# EAGLE board pj13_duplicate (EAGLE 7.4.0)
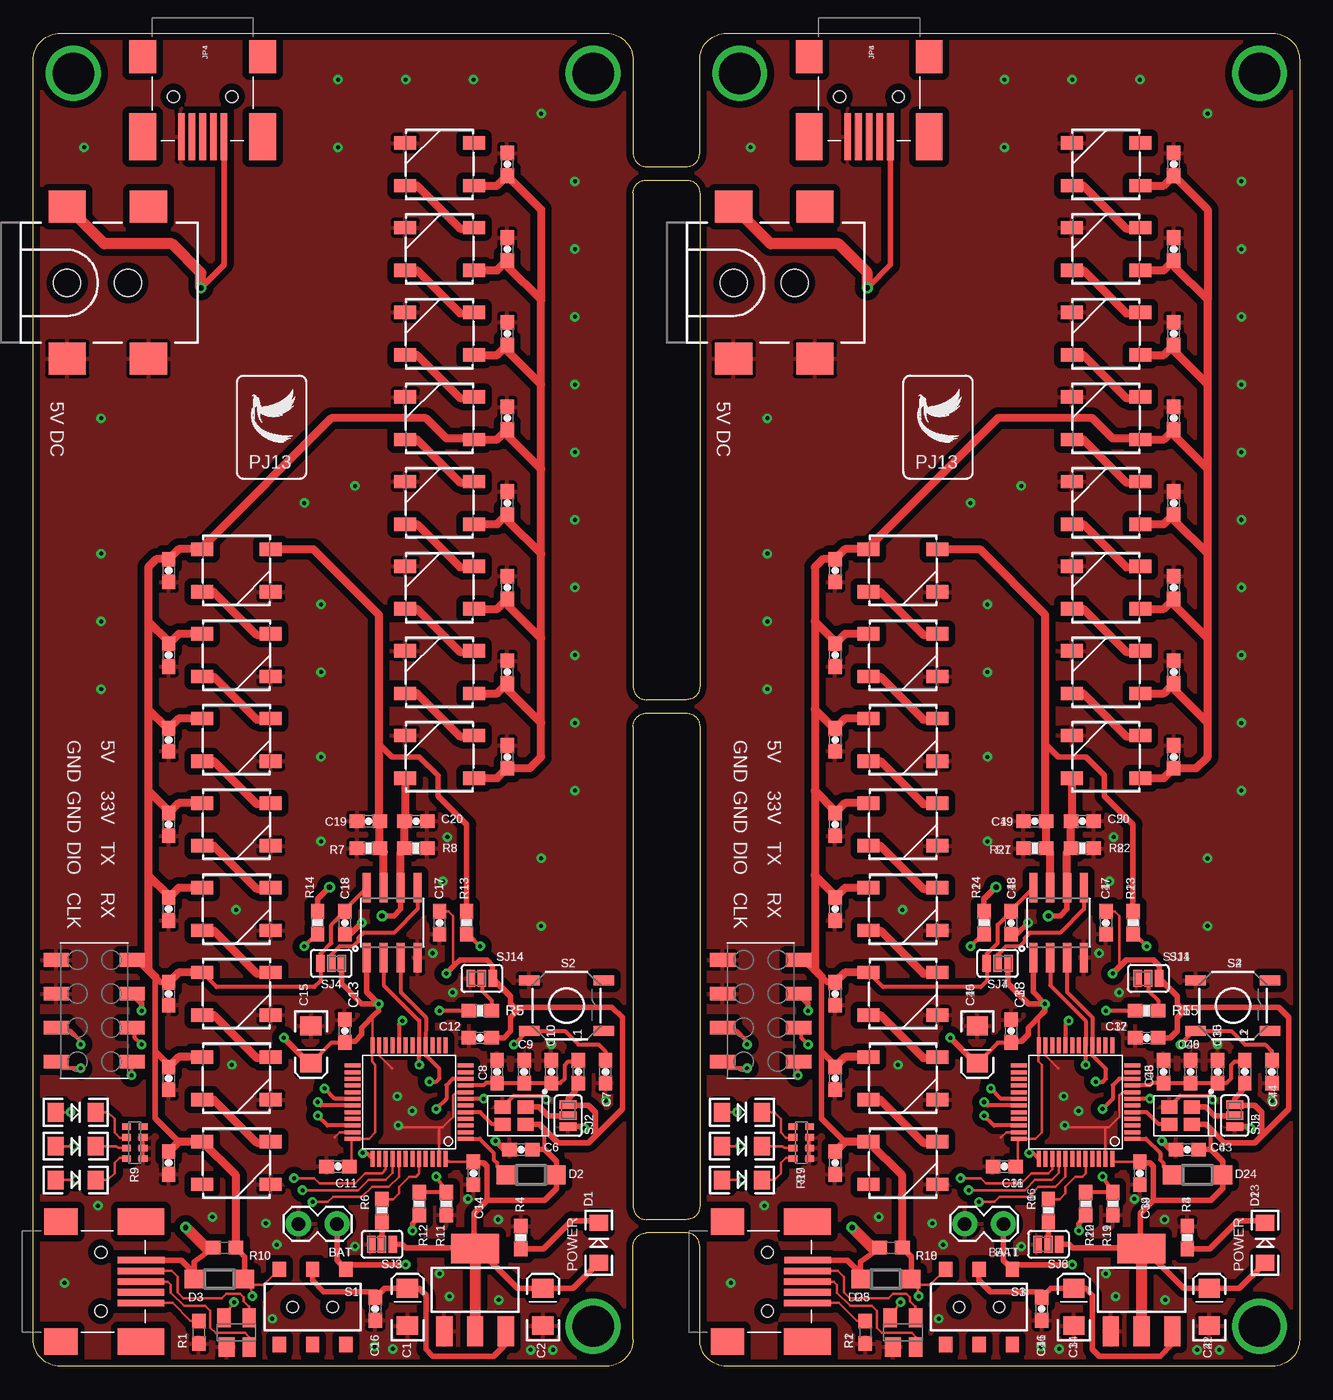
[diagram p0: board, top side]
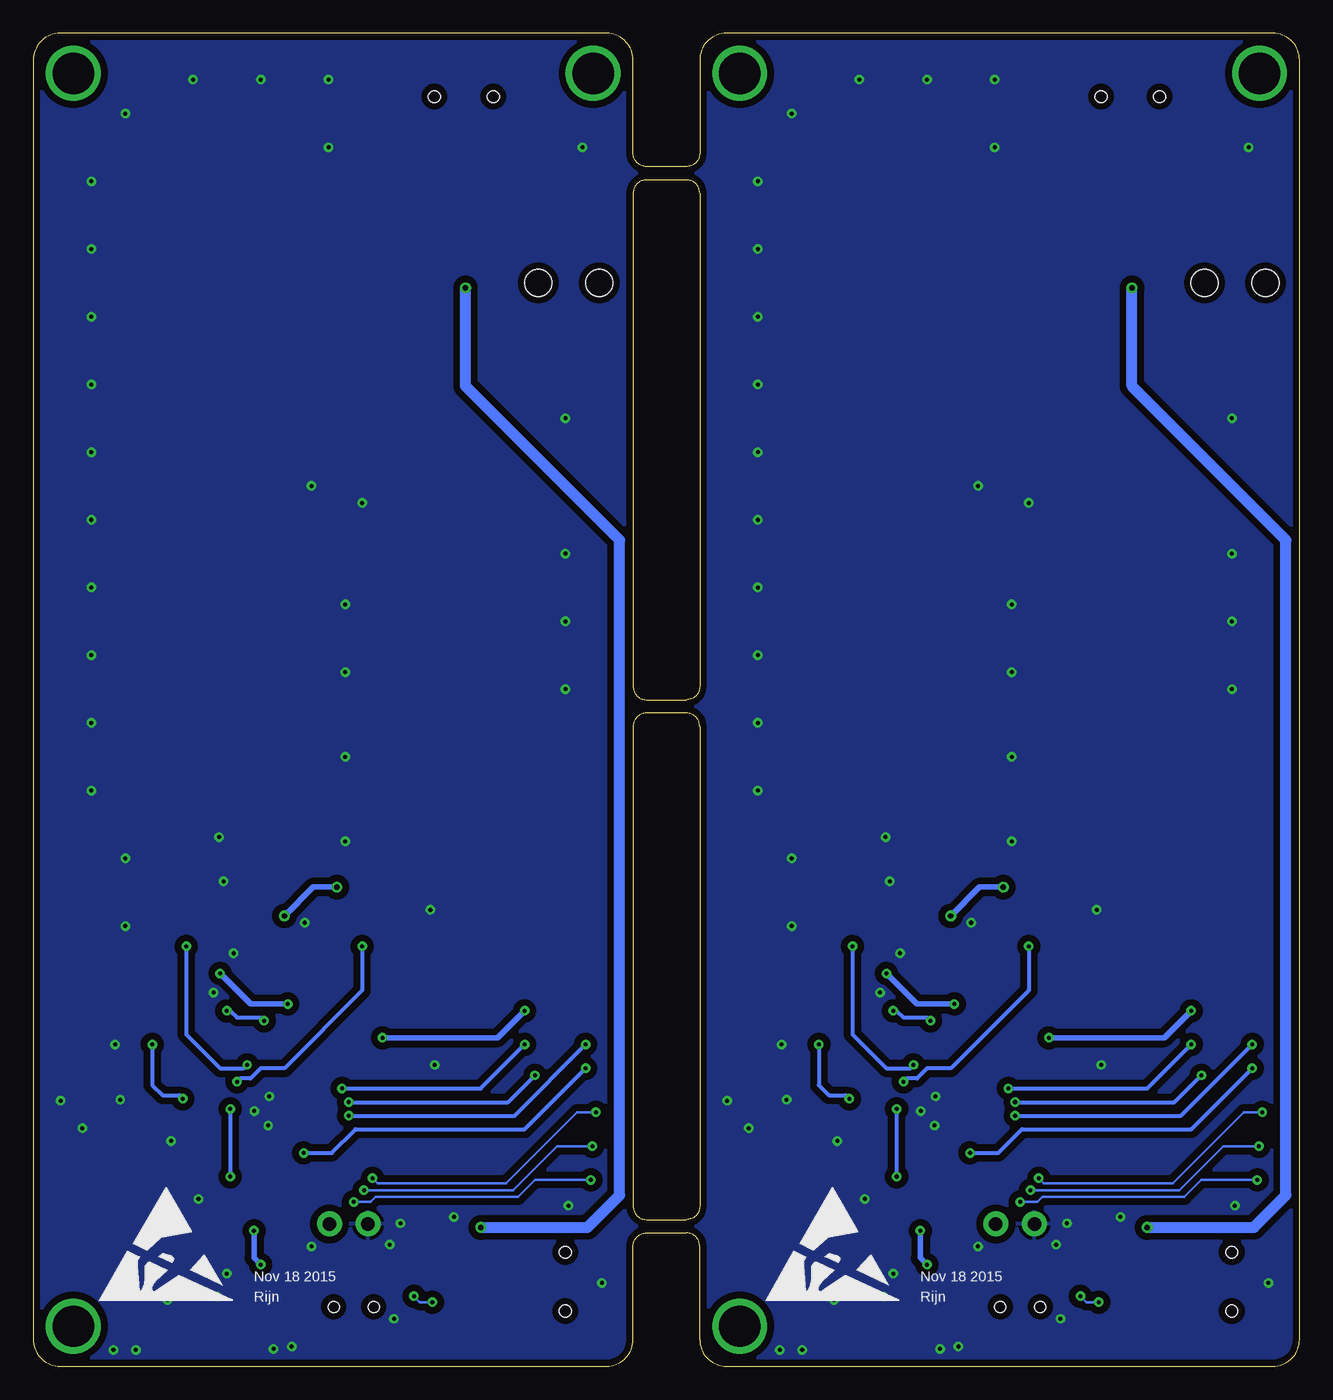
[diagram p1: board, bottom side, seen from below]

Size 95 x 100 mm. Coordinates in mm from the lower left corner, seen from the top.
Outline: 43,0 2,0 arc-90 0,2 0,98 arc-90 2,100 43,100 arc-90 45,98 45,91 arc90 46,90 49,90 arc90 50,91 50,98 arc-90 52,100 93,100 arc-90 95,98 95,2 arc-90 93,0 52,0 arc-90 50,2 50,9 arc90 49,10 46,10 arc90 45,9 45,2 arc-90 43,0
Outline: 45,88 45,51 arc90 46,50 49,50 arc90 50,51 50,88 arc90 49,89 46,89 arc90 45,88
Outline: 45,48 45,12 arc90 46,11 49,11 arc90 50,12 50,48 arc90 49,49 46,49 arc90 45,48
Copper layers (1*16): Top 0.035mm / dielectric 1.5mm / Bottom 0.035mm
Design rules "default *": minimum track width 6mil, minimum drill 12mil, track to track 6mil, track to pad 6mil, pad to pad 6mil, via to via 6mil, smd to smd 6mil, copper to edge 5mil, drill to drill 6mil, minimum pad ring 10mil, minimum via ring 8mil, stop-mask expansion 0mil, vias tented up to drill 12mil, thermal gap 10mil

## Footprints (pad centres in the part's own frame; a part is rotated, then mirrored left to right if it is on the bottom)
1X02_LOCK = drill 1.016 pad 1.88: 1 -0.178,0; 2 2.718,0
EIA3216 = smd 1.4 x 1.6: A 1.4,0; C -1.4,0
0603-CAP = smd 1.1 x 1: 1 -0.85,0; 2 0.85,0
LED-1206 = smd 1.2 x 1.4: A -1.5,0; C 1.5,0
SOD123 = smd 1.4 x 1.4: A 1.9,0; C -1.9,0
WS2812B = smd 1.651 x 1: 1 -2.577,1.6; 2 -2.577,-1.6; 3 2.577,-1.6; 4 2.577,1.6
USB-MINIB-OLD = smd 2.5 x 2: 1 -3,-4.5; 2 -3,4.5 | smd 3.5 x 2: 3 3,-4.5; 4 3,4.5 | smd 3.5 x 0.5: D+ 3,0; D- 3,0.8; GND 3,-1.6; ID 3,-0.8; VBUS 3.01,1.61 | hole 0.9: 0,2.2; 0,-2.2
POWER_JACK_SMD = smd 2.8 x 2.4: GND 0,-5.7; P$4 6.1,-5.7; VIN0 0,5.7; VIN1 6.1,5.7 | hole 2.032: 0,0; 4.572,0
2X4_SMD = smd 1.02 x 1.9: 1 -2.54,-2.85; 2 -2.54,2.85; 3 0,-2.85; 4 0,2.85; 5 2.54,-2.85; 6 2.54,2.85; 7 5.08,-2.85; 8 5.08,2.85
0603 = smd 1.1 x 1: 1 -0.85,0; 2 0.85,0
2.5X2-4-PAD = smd 1.2 x 1: 1 -0.85,-0.65; 2 0.85,-0.65; 3 0.85,0.65; 4 -0.85,0.65
0603-RES = smd 1.1 x 1: 1 -0.85,0; 2 0.85,0
0603-ARV = smd 0.5 x 0.65: 1 -1.2,-0.625; 2 -0.4,-0.625; 3 0.4,-0.625; 4 1.2,-0.625; 5 1.2,0.625; 6 0.4,0.625; 7 -0.4,0.625; 8 -1.2,0.625
AYZ0202 = smd 1 x 1.15: 1 -2.5,2.825; 2 0,2.825; 3 2.5,2.825; 4 -2.5,-2.825; 5 0,-2.825; 6 2.5,-2.825 | hole 0.85: 1.5,0; -1.5,0
TACTILE-SWITCH-SMD = smd 1.524 x 0.762: 1 -2.794,1.905; 2 2.794,1.905; 3 -2.794,-1.905; 4 2.794,-1.905
PAD-JUMPER-3-2OF3_NC_BY_PASTE_YES_SILK_FULL_BOX = smd 0.635 x 1.27: 1 -0.813,0; 2 0,0; 3 0.813,0
SOT223 = smd 1.219 x 2.235: 1 -2.311,-3.099; 2 0,-3.099; 3 2.311,-3.099 | smd 3.6 x 2.2: 4 0,3.099
SOT143 = smd 1.2 x 1.44: 1 -0.75,-1.1 | smd 1 x 1.44: 2 0.95,-1.1; 3 0.95,1.1; 4 -0.95,1.1
LQFP48 = smd 0.3 x 1.2: 1 -2.75,-4.25; 2 -2.25,-4.25; 3 -1.75,-4.25; 4 -1.25,-4.25; 5 -0.75,-4.25; 6 -0.25,-4.25; 7 0.25,-4.25; 8 0.75,-4.25; 9 1.25,-4.25; 10 1.75,-4.25; 11 2.25,-4.25; 12 2.75,-4.25; 25 2.75,4.25; 26 2.25,4.25; 27 1.75,4.25; 28 1.25,4.25; 29 0.75,4.25; 30 0.25,4.25; 31 -0.25,4.25; 32 -0.75,4.25; 33 -1.25,4.25; 34 -1.75,4.25; 35 -2.25,4.25; 36 -2.75,4.25 | smd 1.2 x 0.3: 13 4.25,-2.75; 14 4.25,-2.25; 15 4.25,-1.75; 16 4.25,-1.25; 17 4.25,-0.75; 18 4.25,-0.25; 19 4.25,0.25; 20 4.25,0.75; 21 4.25,1.25; 22 4.25,1.75; 23 4.25,2.25; 24 4.25,2.75; 37 -4.25,2.75; 38 -4.25,2.25; 39 -4.25,1.75; 40 -4.25,1.25; 41 -4.25,0.75; 42 -4.25,0.25; 43 -4.25,-0.25; 44 -4.25,-0.75; 45 -4.25,-1.25; 46 -4.25,-1.75; 47 -4.25,-2.25; 48 -4.25,-2.75
SO08 = smd 0.61 x 2.21: 1 -1.905,-2.616; 2 -0.635,-2.616; 3 0.635,-2.616; 4 1.905,-2.616; 5 1.905,2.616; 6 0.635,2.616; 7 -0.635,2.616; 8 -1.905,2.616

## Placement (x,y rotation side)
BAT  [1X02_LOCK]  22.61,10.67 180 top
BAT1  [1X02_LOCK]  72.61,10.67 180 top
C1  10uF  [EIA3216]  28.07,4.45 90 top
C2  10uF  [EIA3216]  38.23,4.45 90 top
C3  1nF  [0603-CAP]  10.16,46.99 270 top
C4  1nF  [0603-CAP]  10.16,40.64 270 top
C5  1nF  [0603-CAP]  10.16,34.29 270 top
C6  1.0uF  [0603-CAP]  36.58,16.26 0 top
C7  1.0uF  [0603-CAP]  42.93,22.1 90 top
C8  1.0uF  [0603-CAP]  34.8,22.1 90 top
C9  10nF  [0603-CAP]  36.83,22.1 90 top
C10  10nF  [0603-CAP]  38.86,22.1 90 top
C11  0.1uF  [0603-CAP]  22.86,14.99 180 top
C12  0.1uF  [0603-CAP]  33.53,24.64 180 top
C13  0.1uF  [0603-CAP]  23.37,25.15 90 top
C14  0.1uF  [0603-CAP]  33.02,14.48 270 top
C15  10uF  [EIA3216]  20.83,24.13 270 top
C16  10nF  [0603-CAP]  25.65,4.29 270 top
C17  0.1uF  [0603-CAP]  30.48,33.27 270 top
C18  0.1uF  [0603-CAP]  23.37,33.27 270 top
C19  0.1uF  [0603-CAP]  25.15,40.89 180 top
C20  0.1uF  [0603-CAP]  28.7,40.89 0 top
C21  1nF  [0603-CAP]  35.56,90.17 90 top
C22  1nF  [0603-CAP]  35.56,83.82 90 top
C23  1nF  [0603-CAP]  35.56,77.47 90 top
C24  1nF  [0603-CAP]  35.56,71.12 90 top
C25  1nF  [0603-CAP]  35.56,64.77 90 top
C26  1nF  [0603-CAP]  35.56,58.42 90 top
C27  1nF  [0603-CAP]  35.56,45.72 90 top
C28  1nF  [0603-CAP]  35.56,52.07 90 top
C29  1nF  [0603-CAP]  10.16,53.34 270 top
C30  1nF  [0603-CAP]  10.16,59.69 270 top
C31  1nF  [0603-CAP]  10.16,27.94 270 top
C32  1nF  [0603-CAP]  10.16,21.59 270 top
C33  1nF  [0603-CAP]  10.16,15.24 270 top
C34  10uF  [EIA3216]  78.07,4.45 90 top
C35  10nF  [0603-CAP]  88.86,22.1 90 top
C36  0.1uF  [0603-CAP]  72.86,14.99 180 top
C37  0.1uF  [0603-CAP]  83.53,24.64 180 top
C38  0.1uF  [0603-CAP]  73.37,25.15 90 top
C39  0.1uF  [0603-CAP]  83.02,14.48 270 top
C40  10uF  [EIA3216]  70.83,24.13 270 top
C41  10nF  [0603-CAP]  75.65,4.29 270 top
C42  10uF  [EIA3216]  88.23,4.45 90 top
C43  1.0uF  [0603-CAP]  86.58,16.26 0 top
C44  1.0uF  [0603-CAP]  92.93,22.1 90 top
C45  1.0uF  [0603-CAP]  84.8,22.1 90 top
C46  10nF  [0603-CAP]  86.83,22.1 90 top
C47  0.1uF  [0603-CAP]  80.48,33.27 270 top
C48  0.1uF  [0603-CAP]  73.37,33.27 270 top
C49  0.1uF  [0603-CAP]  75.15,40.89 180 top
C50  0.1uF  [0603-CAP]  78.7,40.89 0 top
C51  1nF  [0603-CAP]  85.56,90.17 90 top
C52  1nF  [0603-CAP]  85.56,83.82 90 top
C53  1nF  [0603-CAP]  85.56,77.47 90 top
C54  1nF  [0603-CAP]  85.56,71.12 90 top
C55  1nF  [0603-CAP]  85.56,64.77 90 top
C56  1nF  [0603-CAP]  85.56,58.42 90 top
C57  1nF  [0603-CAP]  85.56,45.72 90 top
C58  1nF  [0603-CAP]  85.56,52.07 90 top
C59  1nF  [0603-CAP]  60.16,53.34 270 top
C60  1nF  [0603-CAP]  60.16,59.69 270 top
C61  1nF  [0603-CAP]  60.16,46.99 270 top
C62  1nF  [0603-CAP]  60.16,40.64 270 top
C63  1nF  [0603-CAP]  60.16,34.29 270 top
C64  1nF  [0603-CAP]  60.16,27.94 270 top
C65  1nF  [0603-CAP]  60.16,21.59 270 top
C66  1nF  [0603-CAP]  60.16,15.24 270 top
D1  YELLOW  [LED-1206]  42.42,9.27 90 top
D2  MBR0520LT  [SOD123]  37.34,14.35 0 top
D3  MBR0520LT  [SOD123]  13.97,6.53 180 top
D4  YELLOW  [LED-1206]  3.17,19.05 0 top
D5  YELLOW  [LED-1206]  3.17,16.51 0 top
D6  YELLOW  [LED-1206]  3.17,13.97 0 top
D7  [WS2812B]  15.24,59.69 0 top
D8  [WS2812B]  15.24,53.34 0 top
D9  [WS2812B]  15.24,46.99 0 top
D10  [WS2812B]  15.24,40.64 0 top
D11  [WS2812B]  15.24,34.29 0 top
D12  [WS2812B]  30.48,45.72 180 top
D13  [WS2812B]  30.48,52.07 180 top
D14  [WS2812B]  30.48,58.42 180 top
D15  [WS2812B]  30.48,64.77 180 top
D16  [WS2812B]  30.48,71.12 180 top
D17  [WS2812B]  15.24,27.94 0 top
D18  [WS2812B]  15.24,21.59 0 top
D19  [WS2812B]  15.24,15.24 0 top
D20  [WS2812B]  30.48,77.47 180 top
D21  [WS2812B]  30.48,83.82 180 top
D22  [WS2812B]  30.48,90.17 180 top
D23  YELLOW  [LED-1206]  92.42,9.27 90 top
D24  MBR0520LT  [SOD123]  87.34,14.35 0 top
D25  MBR0520LT  [SOD123]  63.97,6.53 180 top
D26  YELLOW  [LED-1206]  53.17,19.05 0 top
D27  YELLOW  [LED-1206]  53.17,16.51 0 top
D28  YELLOW  [LED-1206]  53.17,13.97 0 top
D29  [WS2812B]  65.24,59.69 0 top
D30  [WS2812B]  65.24,53.34 0 top
D31  [WS2812B]  65.24,46.99 0 top
D32  [WS2812B]  65.24,40.64 0 top
D33  [WS2812B]  65.24,34.29 0 top
D34  [WS2812B]  80.48,45.72 180 top
D35  [WS2812B]  80.48,52.07 180 top
D36  [WS2812B]  80.48,58.42 180 top
D37  [WS2812B]  80.48,64.77 180 top
D38  [WS2812B]  80.48,71.12 180 top
D39  [WS2812B]  65.24,27.94 0 top
D40  [WS2812B]  65.24,21.59 0 top
D41  [WS2812B]  65.24,15.24 0 top
D42  [WS2812B]  80.48,77.47 180 top
D43  [WS2812B]  80.48,83.82 180 top
D44  [WS2812B]  80.48,90.17 180 top
JP1  USBOLD  [USB-MINIB-OLD]  5.08,6.35 0 top
JP2  5.5x2.1mm Barrel  [POWER_JACK_SMD]  2.54,81.28 0 top
JP3  [2X4_SMD]  4.57,25.4 90 top
JP4  USBOLD  [USB-MINIB-OLD]  12.7,95.25 270 top
JP5  USBOLD  [USB-MINIB-OLD]  55.08,6.35 0 top
JP6  [2X4_SMD]  54.57,25.4 90 top
JP7  5.5x2.1mm Barrel  [POWER_JACK_SMD]  52.54,81.28 0 top
JP8  USBOLD  [USB-MINIB-OLD]  62.7,95.25 270 top
L1  [0603]  40.89,22.1 270 top
L2  [0603]  90.89,22.1 270 top
OS1  OSC-OE-IQXO-793  [2.5X2-4-PAD]  36.07,18.8 180 top
OS2  OSC-OE-IQXO-793  [2.5X2-4-PAD]  86.07,18.8 180 top
R1  0  [0603]  12.42,2.54 270 top
R2  0  [0603]  62.42,2.54 270 top
R3  680  [0603-RES]  86.58,9.65 270 top
R4  680  [0603-RES]  36.58,9.65 270 top
R5  10K  [0603-RES]  33.53,26.67 0 top
R6  10K  [0603-RES]  26.16,11.68 90 top
R7  680  [0603-RES]  25.15,38.86 180 top
R8  680  [0603-RES]  28.7,38.86 0 top
R9  [0603-ARV]  7.62,16.76 270 top
R10  0  [0603]  14.35,8.89 180 top
R11  10K  [0603-RES]  30.99,12.19 270 top
R12  10K  [0603-RES]  28.96,12.19 90 top
R13  0  [0603-RES]  32.51,33.27 90 top
R14  0  [0603-RES]  21.34,33.27 90 top
R15  10K  [0603-RES]  83.53,26.67 0 top
R16  10K  [0603-RES]  76.16,11.68 90 top
R17  [0603-ARV]  57.62,16.76 270 top
R18  0  [0603]  64.35,8.89 180 top
R19  10K  [0603-RES]  80.99,12.19 270 top
R20  10K  [0603-RES]  78.96,12.19 90 top
R21  680  [0603-RES]  75.15,38.86 180 top
R22  680  [0603-RES]  78.7,38.86 0 top
R23  0  [0603-RES]  82.51,33.27 90 top
R24  0  [0603-RES]  71.34,33.27 90 top
S1  [AYZ0202]  20.95,4.45 0 top
S2  SWITCH-MOMENTARY-2SMD  [TACTILE-SWITCH-SMD]  40.01,27.05 0 top
S3  [AYZ0202]  70.95,4.45 0 top
S4  SWITCH-MOMENTARY-2SMD  [TACTILE-SWITCH-SMD]  90,27.05 0 top
SJ1  JUMPER-PAD-3-2OF3_NC_BY_PASTE  [PAD-JUMPER-3-2OF3_NC_BY_PASTE_YES_SILK_FULL_BOX]  83.66,29.08 180 top
SJ2  JUMPER-PAD-3-2OF3_NC_BY_PASTE  [PAD-JUMPER-3-2OF3_NC_BY_PASTE_YES_SILK_FULL_BOX]  40.13,18.8 90 top
SJ3  JUMPER-PAD-3-2OF3_NC_BY_PASTE  [PAD-JUMPER-3-2OF3_NC_BY_PASTE_YES_SILK_FULL_BOX]  26.16,9.14 180 top
SJ4  JUMPER-PAD-3-2OF3_NC_BY_PASTE  [PAD-JUMPER-3-2OF3_NC_BY_PASTE_YES_SILK_FULL_BOX]  22.35,30.23 0 top
SJ5  JUMPER-PAD-3-2OF3_NC_BY_PASTE  [PAD-JUMPER-3-2OF3_NC_BY_PASTE_YES_SILK_FULL_BOX]  90.13,18.8 90 top
SJ6  JUMPER-PAD-3-2OF3_NC_BY_PASTE  [PAD-JUMPER-3-2OF3_NC_BY_PASTE_YES_SILK_FULL_BOX]  76.16,9.14 180 top
SJ7  JUMPER-PAD-3-2OF3_NC_BY_PASTE  [PAD-JUMPER-3-2OF3_NC_BY_PASTE_YES_SILK_FULL_BOX]  72.35,30.23 0 top
SJ14  JUMPER-PAD-3-2OF3_NC_BY_PASTE  [PAD-JUMPER-3-2OF3_NC_BY_PASTE_YES_SILK_FULL_BOX]  33.66,29.08 180 top
U1  [SOT223]  33.15,5.71 0 top
U2  PRTR5V0U2X  [SOT143]  15.24,2.54 0 top
U3  [SOT223]  83.15,5.71 0 top
U4  STM32F103C8T  [LQFP48]  28.19,19.81 90 top
U5  PRTR5V0U2X  [SOT143]  65.24,2.54 0 top
U6  STM32F103C8T  [LQFP48]  78.19,19.81 90 top
U$1  [LOGO]  16.33,69.29 0 top
U$2  [ESD_10.00]  40.13,4.83 0 bottom
U$3  NLSX4373  [SO08]  26.92,33.27 0 top
U$4  [LOGO]  66.33,69.29 0 top
U$5  [ESD_10.00]  90.13,4.83 0 bottom
U$6  NLSX4373  [SO08]  76.92,33.27 0 top

## Library data of the parts
BAT BAT1 JP1 JP3-JP6 JP8 = SparkFun-Connectors
C1 C2 C15 C34 C40 C42 = SparkFun-Capacitors; PROD_ID: CAP-00811
C3-C5 C11-C14 C17-C33 C36-C39 C47-C66 = SparkFun-Capacitors; PROD_ID: CAP-08604
C6-C8 C43-C45 = SparkFun-Capacitors; PROD_ID: CAP-00868
C9 C10 C16 C35 C41 C46 = SparkFun-Capacitors; PROD_ID: CAP-00867
D1 D4-D6 D23 D26-D28 = SparkFun-LED; PROD_ID: DIO-00820
D2 D3 D24 D25 = diode
D7-D22 D29-D44 = SparkFun-LED; PROD_ID: DIO-12503
JP2 JP7 = SparkFun-Connectors; PROD_ID: CONN-08106; SF_ID: PRT-12748
L1 L2 SJ1-SJ7 SJ14 = SparkFun-Passives
OS1 OS2 = IQD-Frequency-Products
R1 R2 R10 R18 = SparkFun-Resistors; PROD_ID: RES-08609
R3 R4 R7 R8 R13 R14 R21-R24 = SparkFun-Resistors; PROD_ID: RES-09333
R5 R6 R11 R12 R15 R16 R19 R20 = SparkFun-Resistors; PROD_ID: RES-00824
R9 R17 = SparkFun-Resistors
S1 S3 = SparkFun-Electromechanical; PROD_ID: SWCH-08179; SF_ID: COM-00597
S2 S4 = SparkFun-Electromechanical; PROD_ID: SWCH-08247
U1 U3 = SparkFun-PowerIC; PROD_ID: VREG-08170
U2 U5 = semicon-smd-ipc
U4 U6 = micro-stm_v3
U$1 U$4 = r1
U$2 U$5 = logo
U$3 U$6 = SparkFun-DigitalIC

## Nets
3.3V: C2.A C6.2 C11.1 C12.1 C13.1 C14.1 C15.A C17.1 D1.A D2.A JP3.5 L1.2 OS1.4 SJ2.3 SJ3.1 SJ4.3 SJ14.1 U1.2 U1.4 U4.24 U4.36 U4.48 U$3.1
3.3V1: C36.1 C37.1 C38.1 C39.1 C40.A C42.A C43.2 C47.1 D23.A D24.A JP6.5 L2.2 OS2.4 SJ1.1 SJ5.3 SJ6.1 SJ7.3 U3.2 U3.4 U6.24 U6.36 U6.48 U$6.1
5V: C3.1 C4.1 C5.1 C18.1 C21.1 C22.1 C23.1 C24.1 C25.1 C26.1 C27.1 C28.1 C29.1 C30.1 C31.1 C32.1 C33.1 D3.C D7.1 D8.1 D9.1 D10.1 D11.1 D12.1 D13.1 D14.1 D15.1 D16.1 D17.1 D18.1 D19.1 D20.1 D21.1 D22.1 JP3.7 R10.1 S1.1 SJ4.1 U2.4 U$3.8
5V1: C48.1 C51.1 C52.1 C53.1 C54.1 C55.1 C56.1 C57.1 C58.1 C59.1 C60.1 C61.1 C62.1 C63.1 C64.1 C65.1 C66.1 D25.C D29.1 D30.1 D31.1 D32.1 D33.1 D34.1 D35.1 D36.1 D37.1 D38.1 D39.1 D40.1 D41.1 D42.1 D43.1 D44.1 JP6.7 R18.1 S3.1 SJ7.1 U5.4 U$6.8
BAT+: BAT.1 R12.1 S1.3
BAT+1: BAT1.1 R20.1 S3.3
BLE_EN: U4.14
BLE_EN1: U6.14
BLE_STATE: U4.11
BLE_STATE1: U6.11
CLK_16M: OS1.3 U4.5
CLK_16M1: OS2.3 U6.5
D+: JP1.D+ U2.2
D+1: JP5.D+ U5.2
D-: JP1.D- U2.3
D-1: JP5.D- U5.3
ESP_CHPD: U4.25
ESP_CHPD1: U6.25
ESP_GPIO0: U4.28
ESP_GPIO1: U6.27
ESP_GPIO2: U4.26
ESP_GPIO3: U6.26
ESP_GPIO4: U6.28
ESP_GPIO16: U4.27
GND: BAT.2 C1.C C2.C C3.2 C4.2 C5.2 C6.1 C7.1 C8.2 C9.2 C10.2 C11.2 C12.2 C13.2 C14.2 C15.C C16.2 C17.2 C18.2 C19.2 C20.2 C21.2 C22.2 C23.2 C24.2 C25.2 C26.2 C27.2 C28.2 C29.2 C30.2 C31.2 C32.2 C33.2 D7.3 D8.3 D9.3 D10.3 D11.3 D12.3 D13.3 D14.3 D15.3 D16.3 D17.3 D18.3 D19.3 D20.3 D21.3 D22.3 JP2.GND JP2.P$4 JP3.6 JP3.8 JP4.GND OS1.2 R1.2 R4.1 R7.2 R8.2 R9.5 R9.6 R9.7 R11.2 S2.1 SJ2.1 SJ3.3 SJ14.3 U1.1 U2.1 U4.8 U4.23 U4.35 U4.47 U$3.4
GND1: BAT1.2 C34.C C35.2 C36.2 C37.2 C38.2 C39.2 C40.C C41.2 C42.C C43.1 C44.1 C45.2 C46.2 C47.2 C48.2 C49.2 C50.2 C51.2 C52.2 C53.2 C54.2 C55.2 C56.2 C57.2 C58.2 C59.2 C60.2 C61.2 C62.2 C63.2 C64.2 C65.2 C66.2 D29.3 D30.3 D31.3 D32.3 D33.3 D34.3 D35.3 D36.3 D37.3 D38.3 D39.3 D40.3 D41.3 D42.3 D43.3 D44.3 JP6.6 JP6.8 JP7.GND JP7.P$4 JP8.GND OS2.2 R2.2 R3.1 R17.5 R17.6 R17.7 R19.2 R21.2 R22.2 S4.1 SJ1.3 SJ5.1 SJ6.3 U3.1 U5.1 U6.8 U6.23 U6.35 U6.47 U$6.4
N$1: JP1.GND R1.1
N$2: D11.2 D17.4
N$3: D1.C R4.2
N$4: D2.C U4.1
N$5: R11.1 R12.2 U4.10
N$6: C8.1 C9.1 C10.1 L1.1 U4.9
N$7: R6.2 U4.44
N$8: D6.A U4.41
N$9: R6.1 SJ3.2
N$10: D17.2 D18.4
N$11: OS1.1 SJ2.2
N$13: D5.A U4.40
N$14: SJ4.2 U$3.5
N$15: D18.2 D19.4
N$16: D4.A U4.39
N$17: D4.C R9.2
N$18: D5.C R9.3
N$19: D6.C R9.4
N$20: C1.A C16.1 S1.2 U1.3
N$24: D12.2 D13.4
N$25: D13.2 D14.4
N$26: R13.1 U4.17 U$3.2
N$27: R14.1 U4.16 U$3.3
N$28: D7.2 D8.4
N$29: D8.2 D9.4
N$30: D9.2 D10.4
N$31: D10.2 D11.4
N$32: D14.2 D15.4
N$33: D15.2 D16.4
N$34: D16.2 D20.4
N$35: D20.2 D21.4
N$36: D21.2 D22.4
N$37: JP5.GND R2.1
N$38: D23.C R3.2
N$39: R16.2 U6.44
N$40: R16.1 SJ6.2
N$41: OS2.1 SJ5.2
N$42: C35.1 C45.1 C46.1 L2.1 U6.9
N$43: D24.C U6.1
N$44: R15.2 SJ1.2
N$45: D28.A U6.41
N$46: D27.A U6.40
N$47: D26.A U6.39
N$48: R5.2 SJ14.2
N$49: D26.C R17.2
N$50: D27.C R17.3
N$51: D28.C R17.4
N$52: C34.A C41.1 S3.2 U3.3
N$53: R19.1 R20.2 U6.10
N$57: SJ7.2 U$6.5
N$58: R23.1 U6.17 U$6.2
N$59: R24.1 U6.16 U$6.3
N$60: D29.2 D30.4
N$61: D30.2 D31.4
N$62: D31.2 D32.4
N$63: D32.2 D33.4
N$64: D34.2 D35.4
N$65: D35.2 D36.4
N$66: D36.2 D37.4
N$67: D37.2 D38.4
N$68: D33.2 D39.4
N$69: D39.2 D40.4
N$70: D40.2 D41.4
N$71: D38.2 D42.4
N$72: D42.2 D43.4
N$73: D43.2 D44.4
NRF_CSN: U4.32
NRF_CSN1: U6.32
NRST: C7.2 S2.3 U4.7
NRST1: C44.2 S4.3 U6.7
OURET: R5.1 U4.20
OURET1: R15.1 U6.20
SIG1: C19.1 D7.4 R7.1 R13.2 U$3.7
SIG2: C20.1 D12.4 R8.1 R14.2 U$3.6
SIG3: C49.1 D29.4 R21.1 R23.2 U$6.7
SIG4: C50.1 D34.4 R22.1 R24.2 U$6.6
SWCLK: JP3.2 U4.37
SWCLK1: JP6.2 U6.37
SWDIO: JP3.4 U4.34
SWDIO1: JP6.4 U6.34
USART1_RX: JP3.1 U4.31
USART1_RX1: JP6.1 U6.31
USART1_TX: JP3.3 U4.30
USART1_TX1: JP6.3 U6.30
USART2_RX: U4.13
USART2_RX1: U6.13
USART2_TX: U4.12
USART2_TX1: U6.12
USART3_RX: U4.22
USART3_RX1: U6.22
USART3_TX: U4.21
USART3_TX1: U6.21
VBUS: D3.A JP1.VBUS JP2.VIN0 JP4.VBUS R10.2
VBUS1: D25.A JP5.VBUS JP7.VIN0 JP8.VBUS R18.2

## Tracks (layer width: path | path; a pad name or v marks a point on that pad's centre or on a via)
3.3V  (via drill 0.3)
  Top 0.203: C14.1 31.18,15.33 U4.48 | 25.65,26.42 25.44,26.21 U4.24 25.4,24.02 25.4,22.86 25.65,22.61 25.65,17.53 25.19,17.06 U4.36 23.88,16.99 23.88,14.99 | C17.1 31.15,34.12 31.5,33.78 31.5,30.23 31.62,30.1
  Top 0.305: 23.37,24.26 22.36,24.26 C15.A | 38.35,16.26 38.35,17.78 38.1,18.03
  Top 0.406: SJ3.1 27.69,9.14 27.94,8.89 33.07,8.89 | 33.07,8.89 U1.4 33.35,8.81 36.32,5.84 C2.A 40.49,5.84 D1.A | 33.07,8.89 33.07,11.48 34.04,12.45 | 34.04,12.45 34.04,14.99 33.78,15.24 33.11,15.24 C14.1 | 34.04,12.45 38.35,12.45 39.24,13.33 D2.A 39.24,15.37 38.35,16.26 C6.2 | OS1.4 37.99,18.15 38.1,18.03 39.37,16.76 41.66,16.76 42.16,17.27 | 42.16,17.27 42.16,19.05 41.66,19.56 40.18,19.56 SJ2.3 40.13,20.07 40.64,20.57 L1.2 | C12.1 35.31,24.64 35.81,25.15 35.81,26.16 36.58,26.92 | 36.58,26.92 43.43,26.92 44.2,26.16 44.2,19.3 42.16,17.27 | 36.58,26.92 36.07,26.92 35.81,27.18 35.81,27.74 SJ14.1 34.47,30.05 34.04,30.48 32,30.48 31.62,30.1 v30.99,29.46 | v25.91,27.18 24.64,27.18 23.11,28.7 23.11,30.18 SJ4.3 | v25.91,27.18 25.91,26.67 25.65,26.42 24.64,25.4 24.64,24.89 24.13,24.38 23.46,24.38 C13.1 23.37,24.26 | C11.1 23.88,14.99 | U$3.1 25.02,28.07 v25.91,27.18 | C15.A 20.7,22.73 v18.8,24.64 | v8.13,26.67 8.13,27.23 JP3.5
  Top 0.813: U1.4 U1.2
  Bottom 0.406: v30.99,29.46 28.7,27.18 v25.91,27.18 | v18.8,24.64 10.16,24.64 v8.13,26.67
3.3V1  (via drill 0.3)
  Top 0.203: C39.1 81.18,15.33 U6.48 | 75.65,26.42 75.44,26.21 U6.24 75.4,24.02 75.4,22.86 75.65,22.61 75.65,17.53 75.19,17.06 U6.36 73.88,16.99 73.88,14.99 | C47.1 81.15,34.12 81.5,33.78 81.5,30.23 81.62,30.1
  Top 0.305: 73.37,24.26 72.36,24.26 C40.A | 88.35,16.26 88.35,17.78 88.1,18.03
  Top 0.406: SJ6.1 77.69,9.14 77.94,8.89 83.07,8.89 | 83.07,8.89 U3.4 83.35,8.81 86.32,5.84 C42.A 90.49,5.84 D23.A | 83.07,8.89 83.07,11.48 84.04,12.45 | 84.04,12.45 84.04,14.99 83.78,15.24 83.11,15.24 C39.1 | 84.04,12.45 88.35,12.45 89.24,13.33 D24.A 89.24,15.37 88.35,16.26 C43.2 | OS2.4 87.99,18.15 88.1,18.03 89.37,16.76 91.66,16.76 92.16,17.27 | 92.16,17.27 92.16,19.05 91.66,19.56 90.18,19.56 SJ5.3 90.13,20.07 90.64,20.57 L2.2 | C37.1 85.31,24.64 85.81,25.15 85.81,26.16 86.58,26.92 | 86.58,26.92 93.43,26.92 94.2,26.16 94.2,19.3 92.16,17.27 | 86.58,26.92 86.07,26.92 85.81,27.18 85.81,27.74 SJ1.1 84.47,30.05 84.04,30.48 82,30.48 81.62,30.1 v80.99,29.46 | v75.91,27.18 74.64,27.18 73.11,28.7 73.11,30.18 SJ7.3 | v75.91,27.18 75.91,26.67 75.65,26.42 74.64,25.4 74.64,24.89 74.13,24.38 73.46,24.38 C38.1 73.37,24.26 | C36.1 73.88,14.99 | U$6.1 75.02,28.07 v75.91,27.18 | C40.A 70.7,22.73 v68.8,24.64 | v58.13,26.67 58.13,27.23 JP6.5
  Top 0.813: U3.4 U3.2
  Bottom 0.406: v80.99,29.46 78.7,27.18 v75.91,27.18 | v68.8,24.64 60.16,24.64 v58.13,26.67
5V  (via drill 0.3)
  Top 0.203: U2.4 14.29,3.72 v15.06,4.8 | 16.31,5.91 D3.C 16.31,6.09 | v16.43,5.26 16.31,6.09 | 16.31,6.09 17.28,6.09 S1.1
  Top 0.305: U$3.8 23.37,34.24 C18.1 22.35,33.11 22.35,31.75 21.54,30.94 SJ4.1 21.54,28.91 21.08,28.45 13.76,28.45 D17.1 | D16.1 33.06,69.56 33.02,69.6 | 12.7,61.47 12.7,61.33 D7.1
  Top 0.406: D3.C 15.87,8.22 R10.1 | 9.14,29.21 9.14,23.62 | 9.14,23.62 9.14,18.61 10.91,16.84 | C32.1 10.16,22.61 9.14,23.62 | C31.1 9.56,28.79 8.89,29.46
  Top 0.61: D7.1 10.91,61.29 C30.1 9.23,60.54 8.64,59.94 8.64,55.88 | D8.1 10.91,54.94 C29.1 10.16,54.36 8.64,55.88 | D9.1 10.91,48.59 C3.1 10.07,47.84 8.64,49.28 | D10.1 10.91,42.24 C4.1 10.16,41.66 8.64,43.18 | D11.1 10.91,35.89 C5.1 10.16,35.31 8.64,36.83 | D17.1 10.91,29.54 C31.1 | D18.1 10.91,23.19 C32.1 | C33.1 10.91,16.84 D19.1 15.2,14.3 R10.1 | 8.64,55.88 8.64,49.28 | 8.64,49.28 8.64,43.18 | 8.64,43.18 8.64,36.83 | 8.64,36.83 8.64,29.72 | 8.64,29.72 8.89,29.46 9.14,29.21 | JP3.7 7.87,30.48 8.64,29.72 | 38.1,48.26 38.1,45.72 37.25,44.87 C27.1 34.81,44.12 D12.1 | 38.1,48.26 38.1,54.61 | 38.1,54.61 38.1,60.96 | 38.1,60.96 38.1,67.31 | 38.1,67.31 38.1,73.66 | 38.1,73.66 38.1,80.01 | 38.1,80.01 38.1,86.78 C21.1 34.81,88.57 D22.1 | 38.1,80.01 35.56,82.55 C22.1 34.81,82.22 D21.1 | 38.1,73.66 35.56,76.2 C23.1 34.81,75.87 D20.1 | 38.1,67.31 35.56,69.85 C24.1 34.81,69.52 D16.1 | 38.1,60.96 35.56,63.5 C25.1 34.81,63.17 D15.1 | 38.1,54.61 35.56,57.15 C26.1 34.81,56.82 D14.1 | 38.1,48.26 35.56,50.8 C28.1 34.81,50.47 D13.1 | 33.02,69.6 30.99,69.6 29.46,71.12 22.35,71.12 12.7,61.47
  Bottom 0.203: v15.06,4.8 16,4.8 v16.43,5.26
5V1  (via drill 0.3)
  Top 0.203: U5.4 64.29,3.72 v65.06,4.8 | 66.31,5.91 D25.C 66.31,6.09 | v66.43,5.26 66.31,6.09 | 66.31,6.09 67.28,6.09 S3.1
  Top 0.305: U$6.8 73.37,34.24 C48.1 72.35,33.11 72.35,31.75 71.54,30.94 SJ7.1 71.54,28.91 71.08,28.45 63.76,28.45 D39.1 | D38.1 83.06,69.56 83.02,69.6 | 62.7,61.47 62.7,61.33 D29.1
  Top 0.406: D25.C 65.87,8.22 R18.1 | 59.14,29.21 59.14,23.62 | 59.14,23.62 59.14,18.61 60.91,16.84 | C65.1 60.16,22.61 59.14,23.62 | C64.1 59.56,28.79 58.89,29.46
  Top 0.61: D29.1 60.91,61.29 C60.1 59.23,60.54 58.64,59.94 58.64,55.88 | D30.1 60.91,54.94 C59.1 60.16,54.36 58.64,55.88 | D31.1 60.91,48.59 C61.1 60.07,47.84 58.64,49.28 | D32.1 60.91,42.24 C62.1 60.16,41.66 58.64,43.18 | D33.1 60.91,35.89 C63.1 60.16,35.31 58.64,36.83 | D39.1 60.91,29.54 C64.1 | D40.1 60.91,23.19 C65.1 | C66.1 60.91,16.84 D41.1 65.2,14.3 R18.1 | 58.64,55.88 58.64,49.28 | 58.64,49.28 58.64,43.18 | 58.64,43.18 58.64,36.83 | 58.64,36.83 58.64,29.72 | 58.64,29.72 58.89,29.46 59.14,29.21 | JP6.7 57.87,30.48 58.64,29.72 | 88.1,48.26 88.1,45.72 87.25,44.87 C57.1 84.81,44.12 D34.1 | 88.1,48.26 88.1,54.61 | 88.1,54.61 88.1,60.96 | 88.1,60.96 88.1,67.31 | 88.1,67.31 88.1,73.66 | 88.1,73.66 88.1,80.01 | 88.1,80.01 88.1,86.78 C51.1 84.81,88.57 D44.1 | 88.1,80.01 85.56,82.55 C52.1 84.81,82.22 D43.1 | 88.1,73.66 85.56,76.2 C53.1 84.81,75.87 D42.1 | 88.1,67.31 85.56,69.85 C54.1 84.81,69.52 D38.1 | 88.1,60.96 85.56,63.5 C55.1 84.81,63.17 D37.1 | 88.1,54.61 85.56,57.15 C56.1 84.81,56.82 D36.1 | 88.1,48.26 85.56,50.8 C58.1 84.81,50.47 D35.1 | 83.02,69.6 80.99,69.6 79.46,71.12 72.35,71.12 62.7,61.47
  Bottom 0.203: v65.06,4.8 66,4.8 v66.43,5.26
BAT+  (via drill 0.3)
  Top 0.406: BAT.1 22.78,7.94 S1.3 23.8,7.62 v27.94,7.62 | R12.1 28.45,10.67 v28.45,10.16
  Bottom 0.406: v28.45,10.16 28.45,8.13 v27.94,7.62
BAT+1  (via drill 0.3)
  Top 0.406: BAT1.1 72.78,7.94 S3.3 73.81,7.62 v77.94,7.62 | R20.1 78.45,10.67 v78.45,10.16
  Bottom 0.406: v78.45,10.16 78.45,8.13 v77.94,7.62
CLK_16M
  Top 0.305: OS1.3 34.43,18.15 33.53,19.05 32.46,19.05 U4.5
CLK_16M1
  Top 0.305: OS2.3 84.43,18.15 83.53,19.05 82.46,19.05 U6.5
D+
  Top 0.203: JP1.D+ 10.08,6.35 10.31,6.12 10.31,5.51 11.3,4.52 12.9,4.52 13.28,4.14 13.28,2.87 13.66,2.49 15.9,2.49 16.2,2.18 16.2,1.46 U2.2
D+1
  Top 0.203: JP5.D+ 60.08,6.35 60.31,6.12 60.31,5.51 61.3,4.52 62.9,4.52 63.28,4.14 63.28,2.87 63.66,2.49 65.9,2.49 66.2,2.18 66.2,1.46 U5.2
D-
  Top 0.203: JP1.D- 10.38,7.15 10.82,6.71 10.82,5.54 11.25,5.11 14.15,5.11 14.48,5.44 15.52,5.44 15.77,5.18 15.77,4.88 16.15,4.5 16.18,4.5 U2.3
D-1
  Top 0.203: JP5.D- 60.38,7.15 60.82,6.71 60.82,5.54 61.25,5.11 64.15,5.11 64.48,5.44 65.52,5.44 65.77,5.18 65.77,4.88 66.15,4.5 66.18,4.5 U5.3
GND  (via drill 0.3)
  Top 0.203: R9.7 R9.6 R9.5 | U4.8 31.74,20.56 31.5,20.32 31.5,18.72 30.71,17.93 30.38,17.93 | 30.38,17.93 27.51,17.93 v27.38,18.06 | U4.47 30.44,17.87 30.38,17.93 | U4.23 25.94,23.31 26.92,22.33 | U4.35 23,17.56 22.61,17.17 | OS1.2 35.22,19.47
  Top 0.305: 35.22,19.47 36.04,20.3 38.18,20.3 v38.48,19.99
  Top 0.406: C18.2 23.79,32.42 v24.64,33.27 | SJ2.1 41.1,17.98 v41.33,17.86 | C6.1 35.31,16.26 v34.67,16.89
  other vias: 29.97,30.99 38.1,33.02 38.1,38.1 40.64,43.18 40.64,48.26 40.64,53.34 40.64,58.42 40.64,63.5 40.64,68.58 40.64,73.66 40.64,78.74 40.64,83.82 40.64,88.9 38.1,93.98 33.02,96.52 27.94,96.52 22.86,96.52 22.86,91.44 38.86,24.13 42.95,19.91 32.61,12.55 34.87,11 24.13,8.99 17.45,10.72 14.88,22.61 4.85,12.04 13.44,11.2 2.34,6.25 27.3,20.24 28.42,19.15 15.21,34.24 21.59,39.37 21.59,45.72 21.59,52.07 21.59,57.15 20.32,64.77 24.13,66.04 5.08,71.12 3.81,91.44 5.08,60.96 5.08,55.88 5.08,50.8 25.6,1.47 26.97,1.3 31.22,5.23 30.48,6.93 37.31,1.22 38.99,1.22 34.92,4.98 17.93,3.56 18.26,9.12 30.73,36.37 31.06,39.7 31.47,28.04
  pour Top (isolate 0.508): -2.54,114.3 48.26,114.3 48.26,-2.54 -2.54,-2.54
  pour Bottom (isolate 0.508): -10.16,106.68 50.8,106.68 50.8,-2.54 -10.16,-2.54
GND1  (via drill 0.3)
  Top 0.203: R17.7 R17.6 R17.5 | U6.8 81.74,20.56 81.5,20.32 81.5,18.72 80.71,17.93 80.38,17.93 | 80.38,17.93 77.51,17.93 v77.38,18.06 | U6.47 80.44,17.87 80.38,17.93 | U6.23 75.94,23.31 76.92,22.33 | U6.35 73,17.56 72.61,17.17 | OS2.2 85.22,19.47
  Top 0.305: 85.22,19.47 86.04,20.3 88.18,20.3 v88.48,19.99
  Top 0.406: C48.2 73.79,32.42 v74.64,33.27 | SJ5.1 91.1,17.98 v91.33,17.86 | C43.1 85.31,16.26 v84.67,16.89
  other vias: 79.97,30.99 88.1,33.02 88.1,38.1 90.64,43.18 90.64,48.26 90.64,53.34 90.64,58.42 90.64,63.5 90.64,68.58 90.64,73.66 90.64,78.74 90.64,83.82 90.64,88.9 88.1,93.98 83.02,96.52 77.94,96.52 72.86,96.52 72.86,91.44 88.86,24.13 92.95,19.91 82.61,12.55 84.87,11 74.13,8.99 67.45,10.72 64.88,22.61 54.85,12.04 63.44,11.2 52.34,6.25 77.31,20.24 78.42,19.15 65.21,34.24 71.59,39.37 71.59,45.72 71.59,52.07 71.59,57.15 70.32,64.77 74.13,66.04 55.08,71.12 53.81,91.44 55.08,60.96 55.08,55.88 55.08,50.8 75.6,1.47 76.97,1.3 81.22,5.23 80.48,6.93 87.31,1.22 88.99,1.22 84.92,4.98 67.93,3.56 68.26,9.12 80.73,36.37 81.06,39.7 81.47,28.04
  pour Top (isolate 0.508): 47.46,114.3 98.26,114.3 98.26,-2.54 47.46,-2.54
  pour Bottom (isolate 0.508): 47.84,106.68 100.8,106.68 100.8,-2.54 47.84,-2.54
N$1
  Top 0.203: JP1.GND 10.44,4.75 11.79,3.4 12.41,3.4 R1.1
N$2
  Top 0.61: D11.2 13.54,32.69 16.76,29.46 17.89,29.46 | 18.29,29.46 17.89,29.46 | 17.89,29.46 D17.4
N$3
  Top 0.406: R4.2 38.27,8.8 40.39,10.92 42.27,10.92 D1.C
N$4
  Top 0.305: U4.1 33.48,17.06 34.54,16 34.54,15.49 34.8,15.24 34.8,14.99 D2.C
N$5  (via drill 0.3)
  Top 0.305: U4.10 31.47,21.56 30.99,21.08 30.99,20.07 v30.23,19.3 | v30.23,14.22 R11.1 R12.2
  Bottom 0.305: v30.23,19.3 v30.23,14.22
N$6
  Top 0.305: U4.9 32.46,21.08 33.78,21.08 33.95,21.25 C8.1 C9.1 C10.1 39.54,21.25 39.88,21.59 39.88,22.61 40.13,22.86 40.81,22.86 L1.1
N$7
  Top 0.203: R6.2 27.01,12.53 27.43,12.95 27.43,13.46 28.19,14.22 28.7,14.22 28.96,14.48 28.96,15.55 U4.44
N$8  (via drill 0.3)
  Top 0.203: U4.41 27.44,15.51 27.43,15.49 27.43,14.22 26.67,13.46 25.4,13.46 24.64,12.7 22.48,12.7 22.1,12.32 v20.95,12.32 | D6.A v3.17,13.97
  Bottom 0.203: v3.17,13.97 7.37,13.97 8.64,12.7 19.3,12.7 19.68,12.32 v20.95,12.32
N$9
  Top 0.406: R6.1 SJ3.2
N$10
  Top 0.61: D17.2 13.54,26.34 16.76,23.11 17.74,23.11 D18.4
N$11
  Top 0.406: OS1.1 37.96,19.45 38.61,18.8 SJ2.2
N$12  (via drill 3.1)
  other vias: 42,3
N$13  (via drill 0.3)
  Top 0.203: U4.40 26.94,14.5 26.42,13.97 25.15,13.97 24.38,13.21 v20.19,13.21 | D5.A v3.05,16.51
  Bottom 0.203: v3.05,16.51 5.71,16.51 9.02,13.21 v20.19,13.21
N$14
  Top 0.305: U$3.5 28.83,34.29 27.05,32.51 24.77,32.51 24.38,32.13 24.38,31.88 24,31.5 22.99,31.5 22.35,30.86 SJ4.2
N$15
  Top 0.61: D18.2 13.54,19.99 16.76,16.76 17.74,16.76 D19.4
N$16  (via drill 0.3)
  Top 0.203: U4.39 26.44,14.76 26.16,14.48 24.89,14.48 24.13,13.72 21.46,13.72 21.08,14.1 v19.56,14.1 | D4.A v2.79,19.05
  Bottom 0.203: v2.79,19.05 4.19,19.05 9.53,13.72 19.18,13.72 v19.56,14.1
N$17
  Top 0.203: D4.C 5.59,19.05 6.1,18.54 6.1,17.53 6.48,17.14 6.98,17.14 R9.2
N$18
  Top 0.203: D5.C 6.22,16.51 6.35,16.38 6.98,16.38 R9.3
N$19
  Top 0.203: D6.C 5.59,13.97 6.1,14.48 6.1,15.24 6.48,15.62 6.94,15.62 R9.4
N$20
  Top 0.406: S1.2 20.95,6.43 21.79,5.59 25.72,5.59 C16.1 26.36,5.84 C1.A 28.95,5.84 29.46,5.33 29.46,1.27 29.97,0.76 34.54,0.76 35.31,1.52 35.31,2.46 U1.3
N$21  (via drill 3.1)
  other vias: 42,97
N$22  (via drill 3.1)
  other vias: 3,97
N$24
  Top 0.61: D13.4 28.78,50.47 32,47.24 32.98,47.24 D12.2
N$25
  Top 0.61: D14.4 28.78,56.82 32,53.59 32.98,53.59 D13.2
N$26  (via drill 0.3)
  Top 0.305: R13.1 32.6,32.42 v33.53,31.5 | v28.96,22.61 28.96,24.05 U4.17 28.96,24.07 28.96,25.91 26.29,28.57 U$3.2
  Bottom 0.305: v33.53,31.5 33.53,24.89 30.99,22.35 29.21,22.35 v28.96,22.61
N$27  (via drill 0.3)
  Top 0.305: R14.1 21.25,32.42 v20.32,31.5 | v29.72,21.34 30.23,21.34 30.48,21.59 30.48,22.3 29.46,23.32 29.46,24.04 U4.16 29.46,26.16 27.56,28.07 U$3.3
  Bottom 0.305: v20.32,31.5 20.32,28.19 26.16,22.35 27.94,22.35 28.7,21.59 29.46,21.59 v29.72,21.34
N$28
  Top 0.61: D7.2 13.54,58.09 16.76,54.86 17.74,54.86 D8.4
N$29
  Top 0.61: D8.2 13.54,51.74 16.76,48.51 17.74,48.51 D9.4
N$30
  Top 0.61: D9.2 13.54,45.39 16.76,42.16 17.74,42.16 D10.4
N$31
  Top 0.61: D10.2 13.54,39.04 16.76,35.81 17.74,35.81 D11.4
N$32
  Top 0.61: D15.4 28.78,63.17 32,59.94 32.98,59.94 D14.2
N$33
  Top 0.61: D16.4 28.78,69.52 32,66.29 32.98,66.29 D15.2
N$34
  Top 0.61: D20.4 28.78,75.87 32,72.64 32.98,72.64 D16.2
N$35
  Top 0.61: D21.4 28.78,82.22 32,78.99 32.98,78.99 D20.2
N$36
  Top 0.61: D22.4 28.78,88.57 32,85.34 32.98,85.34 D21.2
N$37
  Top 0.203: JP5.GND 60.44,4.75 61.79,3.4 62.41,3.4 R2.1
N$38
  Top 0.406: R3.2 88.27,8.8 90.39,10.92 92.27,10.92 D23.C
N$39
  Top 0.203: R16.2 77.01,12.53 77.43,12.95 77.43,13.46 78.19,14.22 78.7,14.22 78.96,14.48 78.96,15.55 U6.44
N$40
  Top 0.406: R16.1 SJ6.2
N$41
  Top 0.406: OS2.1 87.96,19.45 88.61,18.8 SJ5.2
N$42
  Top 0.305: U6.9 82.46,21.08 83.78,21.08 83.95,21.25 C45.1 C46.1 C35.1 89.54,21.25 89.88,21.59 89.88,22.61 90.13,22.86 90.81,22.86 L2.1
N$43
  Top 0.305: U6.1 83.48,17.06 84.54,16 84.54,15.49 84.8,15.24 84.8,14.99 D24.C
N$44
  Top 0.305: SJ1.2 83.66,28.17 84.39,27.43 84.39,26.68 R15.2
N$45  (via drill 0.3)
  Top 0.203: U6.41 77.44,15.51 77.43,15.49 77.43,14.22 76.67,13.46 75.4,13.46 74.64,12.7 72.48,12.7 72.1,12.32 v70.95,12.32 | D28.A v53.17,13.97
  Bottom 0.203: v53.17,13.97 57.37,13.97 58.64,12.7 69.3,12.7 69.69,12.32 v70.95,12.32
N$46  (via drill 0.3)
  Top 0.203: U6.40 76.94,14.5 76.42,13.97 75.15,13.97 74.38,13.21 v70.19,13.21 | D27.A v53.05,16.51
  Bottom 0.203: v53.05,16.51 55.72,16.51 59.02,13.21 v70.19,13.21
N$47  (via drill 0.3)
  Top 0.203: U6.39 76.44,14.76 76.16,14.48 74.89,14.48 74.13,13.72 71.46,13.72 71.08,14.1 v69.56,14.1 | D26.A v52.79,19.05
  Bottom 0.203: v52.79,19.05 54.19,19.05 59.52,13.72 69.18,13.72 v69.56,14.1
N$48
  Top 0.305: SJ14.2 33.66,28.17 34.39,27.43 34.39,26.68 R5.2
N$49
  Top 0.203: D26.C 55.59,19.05 56.1,18.54 56.1,17.53 56.48,17.14 56.98,17.14 R17.2
N$50
  Top 0.203: D27.C 56.22,16.51 56.35,16.38 56.98,16.38 R17.3
N$51
  Top 0.203: D28.C 55.59,13.97 56.1,14.48 56.1,15.24 56.48,15.62 56.94,15.62 R17.4
N$52
  Top 0.406: S3.2 70.95,6.43 71.79,5.59 75.72,5.59 C41.1 76.36,5.84 C34.A 78.95,5.84 79.46,5.33 79.46,1.27 79.97,0.76 84.54,0.76 85.31,1.52 85.31,2.46 U3.3
N$53  (via drill 0.3)
  Top 0.305: U6.10 81.47,21.56 80.99,21.08 80.99,20.07 v80.23,19.3 | v80.23,14.22 R19.1 R20.2
  Bottom 0.305: v80.23,19.3 v80.23,14.22
N$54  (via drill 3.1)
  other vias: 92,3
N$55  (via drill 3.1)
  other vias: 92,97
N$56  (via drill 3.1)
  other vias: 53,97
N$57
  Top 0.305: U$6.5 78.83,34.29 77.05,32.51 74.77,32.51 74.38,32.13 74.38,31.88 74,31.5 72.99,31.5 72.35,30.86 SJ7.2
N$58  (via drill 0.3)
  Top 0.305: R23.1 82.6,32.42 v83.53,31.5 | v78.96,22.61 78.96,24.05 U6.17 78.96,24.07 78.96,25.91 76.29,28.57 U$6.2
  Bottom 0.305: v83.53,31.5 83.53,24.89 80.99,22.35 79.21,22.35 v78.96,22.61
N$59  (via drill 0.3)
  Top 0.305: R24.1 71.25,32.42 v70.32,31.5 | v79.72,21.34 80.23,21.34 80.48,21.59 80.48,22.3 79.46,23.32 79.46,24.04 U6.16 79.46,26.16 77.56,28.07 U$6.3
  Bottom 0.305: v70.32,31.5 70.32,28.19 76.16,22.35 77.94,22.35 78.7,21.59 79.46,21.59 v79.72,21.34
N$60
  Top 0.61: D29.2 63.54,58.09 66.76,54.86 67.74,54.86 D30.4
N$61
  Top 0.61: D30.2 63.54,51.74 66.76,48.51 67.74,48.51 D31.4
N$62
  Top 0.61: D31.2 63.54,45.39 66.76,42.16 67.74,42.16 D32.4
N$63
  Top 0.61: D32.2 63.54,39.04 66.76,35.81 67.74,35.81 D33.4
N$64
  Top 0.61: D35.4 78.78,50.47 82,47.24 82.98,47.24 D34.2
N$65
  Top 0.61: D36.4 78.78,56.82 82,53.59 82.98,53.59 D35.2
N$66
  Top 0.61: D37.4 78.78,63.17 82,59.94 82.98,59.94 D36.2
N$67
  Top 0.61: D38.4 78.78,69.52 82,66.29 82.98,66.29 D37.2
N$68
  Top 0.61: D33.2 63.54,32.69 66.76,29.46 67.89,29.46 | 68.29,29.46 67.89,29.46 | 67.89,29.46 D39.4
N$69
  Top 0.61: D39.2 63.54,26.34 66.76,23.11 67.74,23.11 D40.4
N$70
  Top 0.61: D40.2 63.54,19.99 66.76,16.76 67.74,16.76 D41.4
N$71
  Top 0.61: D42.4 78.78,75.87 82,72.64 82.98,72.64 D38.2
N$72
  Top 0.61: D43.4 78.78,82.22 82,78.99 82.98,78.99 D42.2
N$73
  Top 0.61: D44.4 78.78,88.57 82,85.34 82.98,85.34 D43.2
NRST  (via drill 0.3)
  Top 0.305: C7.2 42.93,23.62 42.42,24.13 40.89,24.13 39.88,25.15 S2.3 37.08,25.15 v36.07,24.13 | v33.78,20.07 U4.7 | 32,20.07 U4.7 | U4.7
  Bottom 0.305: v36.07,24.13 36.07,21.08 35.31,20.32 34.04,20.32 v33.78,20.07
NRST1  (via drill 0.3)
  Top 0.305: C44.2 92.93,23.62 92.42,24.13 90.89,24.13 89.88,25.15 S4.3 87.08,25.15 v86.07,24.13 | v83.78,20.07 U6.7 | 82,20.07 U6.7 | U6.7
  Bottom 0.305: v86.07,24.13 86.07,21.08 85.31,20.32 84.04,20.32 v83.78,20.07
OURET  (via drill 0.3)
  Top 0.305: R5.1 v30.48,26.67 | v27.69,25.91 27.43,25.65 27.43,24.07 U4.20
  Bottom 0.305: v30.48,26.67 30.23,26.67 29.72,26.16 27.94,26.16 v27.69,25.91
OURET1  (via drill 0.3)
  Top 0.305: R15.1 v80.48,26.67 | v77.69,25.91 77.43,25.65 77.43,24.07 U6.20
  Bottom 0.305: v80.48,26.67 80.23,26.67 79.72,26.16 77.94,26.16 v77.69,25.91
SIG1
  Top 0.406: R13.2 32.51,40.64 30.35,42.8 30.35,44.32 28.96,45.72 26.92,45.72 25.91,46.74
  Top 0.61: U$3.7 26.29,38.57 R7.1 C19.1 25.91,40.98 25.91,46.74 25.91,56.39 21.01,61.29 D7.4
SIG2  (via drill 0.41)
  Top 0.406: R14.2 21.34,35.05 v22.23,35.94 | v26.16,33.78 27.05,33.78 27.56,34.29 U$3.6
  Top 0.61: D12.4 27.9,40.95 C20.1 R8.1 27.56,38.57 U$3.6
  Bottom 0.406: v22.23,35.94 24,35.94 v26.16,33.78
SIG3
  Top 0.406: R23.2 82.51,40.64 80.35,42.8 80.35,44.32 78.96,45.72 76.92,45.72 75.91,46.74
  Top 0.61: U$6.7 76.29,38.57 R21.1 C49.1 75.91,40.98 75.91,46.74 75.91,56.39 71.01,61.29 D29.4
SIG4  (via drill 0.41)
  Top 0.406: R24.2 71.34,35.05 v72.22,35.94 | v76.16,33.78 77.05,33.78 77.56,34.29 U$6.6
  Top 0.61: D34.4 77.9,40.95 C50.1 R22.1 77.56,38.57 U$6.6
  Bottom 0.406: v72.22,35.94 74,35.94 v76.16,33.78
SWCLK  (via drill 0.3)
  Top 0.305: v3.56,22.35 2.23,22.35 JP3.2 | v24.71,16 25,16 U4.37
  Bottom 0.305: v24.71,16 22.61,16 20.83,17.78 8.13,17.78 v3.56,22.35
SWCLK1  (via drill 0.3)
  Top 0.305: v53.56,22.35 52.23,22.35 JP6.2 | v74.71,16 75,16 U6.37
  Bottom 0.305: v74.71,16 72.61,16 70.83,17.78 58.13,17.78 v53.56,22.35
SWDIO  (via drill 0.3)
  Top 0.305: U4.34 22.07,18.06 v21.34,18.8 | v3.56,24.13 3.56,24.38 2.79,25.15 1.98,25.15 JP3.4
  Bottom 0.305: v21.34,18.8 8.89,18.8 v3.56,24.13
SWDIO1  (via drill 0.3)
  Top 0.305: U6.34 72.07,18.06 v71.34,18.8 | v53.56,24.13 53.56,24.38 52.79,25.15 51.98,25.15 JP6.4
  Bottom 0.305: v71.34,18.8 58.89,18.8 v53.56,24.13
USART1_RX  (via drill 0.3)
  Top 0.305: U4.31 21.59,19.56 v21.34,19.81 | v7.37,21.82 7.37,22.8 JP3.1
  Bottom 0.305: v21.34,19.81 9.4,19.81 v7.37,21.82
USART1_RX1  (via drill 0.3)
  Top 0.305: U6.31 71.59,19.56 v71.34,19.81 | v57.37,21.82 57.37,22.8 JP6.1
  Bottom 0.305: v71.34,19.81 59.4,19.81 v57.37,21.82
USART1_TX  (via drill 0.3)
  Top 0.305: U4.30 22.61,20.06 v21.84,20.83 | v8.13,24.13 7.62,24.64 7.62,25.2 JP3.3
  Bottom 0.305: v21.84,20.83 11.43,20.83 v8.13,24.13
USART1_TX1  (via drill 0.3)
  Top 0.305: U6.30 72.61,20.06 v71.84,20.83 | v58.13,24.13 57.62,24.64 57.62,25.2 JP6.3
  Bottom 0.305: v71.84,20.83 61.43,20.83 v58.13,24.13
VBUS  (via drill 0.41)
  Top 0.203: 12.06,6.99 12.06,6.36 D3.A
  Top 0.406: JP1.VBUS 11.09,7.96 12.06,6.99 12.06,7.83 R10.2 | JP4.VBUS 14.31,82.64 v12.57,80.9
  Top 0.813: R10.2 12.95,8.89 v11.43,10.41 | v12.57,80.9 12.57,82.04 10.41,84.2 5.32,84.2 JP2.VIN0
  Bottom 0.813: v11.43,10.41 3.43,10.41 1.02,12.83 1.02,61.98 12.57,73.53 v12.57,80.9
VBUS1  (via drill 0.41)
  Top 0.203: 62.06,6.99 62.06,6.36 D25.A
  Top 0.406: JP5.VBUS 61.09,7.96 62.06,6.99 62.06,7.83 R18.2 | JP8.VBUS 64.31,82.64 v62.57,80.9
  Top 0.813: R18.2 62.95,8.89 v61.43,10.41 | v62.57,80.9 62.57,82.04 60.41,84.2 55.32,84.2 JP7.VIN0
  Bottom 0.813: v61.43,10.41 53.43,10.41 51.02,12.83 51.02,61.98 62.57,73.53 v62.57,80.9

## Text on the board
tNames: 5V DC | 5V DC | PJ13 | PJ13 | GND | 5V | GND | 5V | GND | 33V | GND | 33V | DIO | TX | DIO | TX | CLK | RX | CLK | RX | POWER | POWER
bNames: Nov 18 2015 | Nov 18 2015 | Rijn | Rijn
_tNames: JP4 | JP4 | C19 | C20 | C19 | C20 | R7 | R8 | R7 | R8 | R14 | C18 | C17 | R13 | R14 | C18 | C17 | R13 | SJ14 | SJ14 | S2 | S2 | C15 | C15 | SJ4 | SJ4 | C13 | C13 | C12 | R5 | C12 | R5 | L1 | L1 | C9 | C10 | C9 | C10 | C8 | C8 | C7 | C7 | SJ2 | SJ2 | C6 | C6 | R9 | R9 | C11 | D2 | C11 | D2 | C14 | R4 | C14 | R4 | R6 | D1 | R6 | D1 | R12 | R11 | R12 | R11 | R10 | BAT | R10 | BAT | SJ3 | SJ3 | D3 | S1 | D3 | S1 | R1 | C16 | R1 | C16 | C1 | C2 | C1 | C2